# Altium PCB PCB1.PcbDoc
Units mm, origin at the board's own origin, x right, y up, seen from the top; angles counter-clockwise.
Board outline 50 x 30 mm, 2 copper layers (Top Layer, Bottom Layer), stack 1.581 mm thick; 38 components, 18 nets, 107 pads, 263 vias.
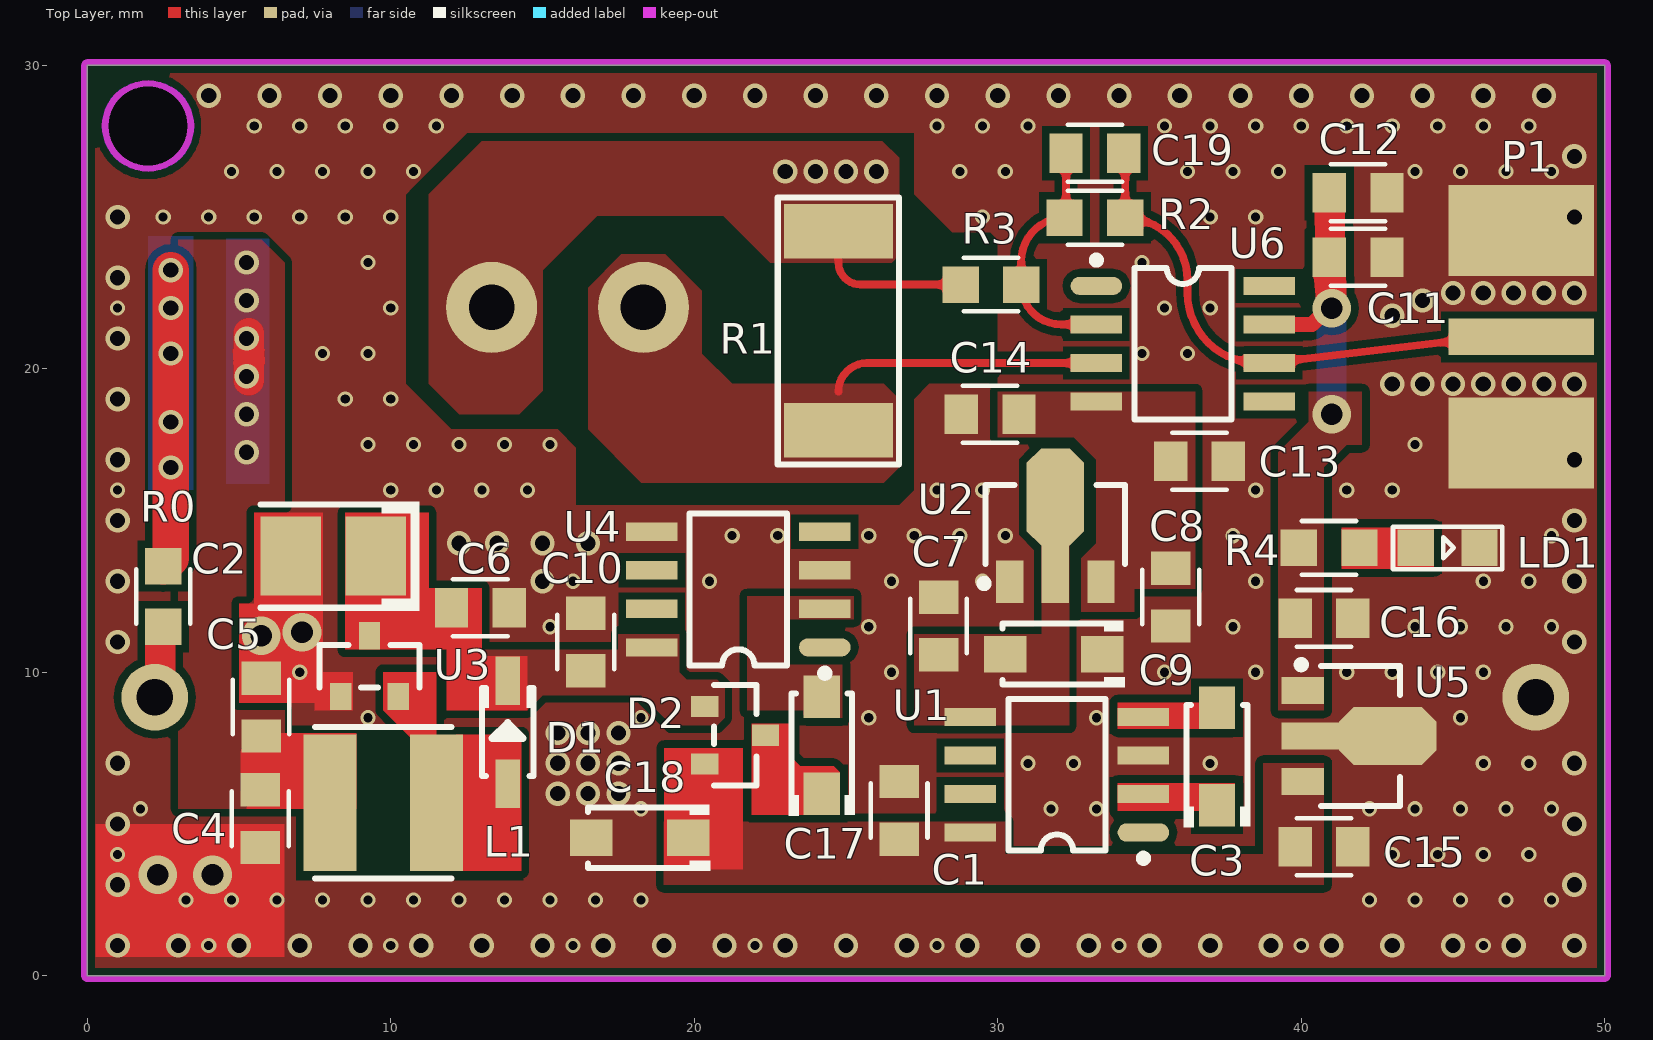
[diagram p0: Top Layer view]
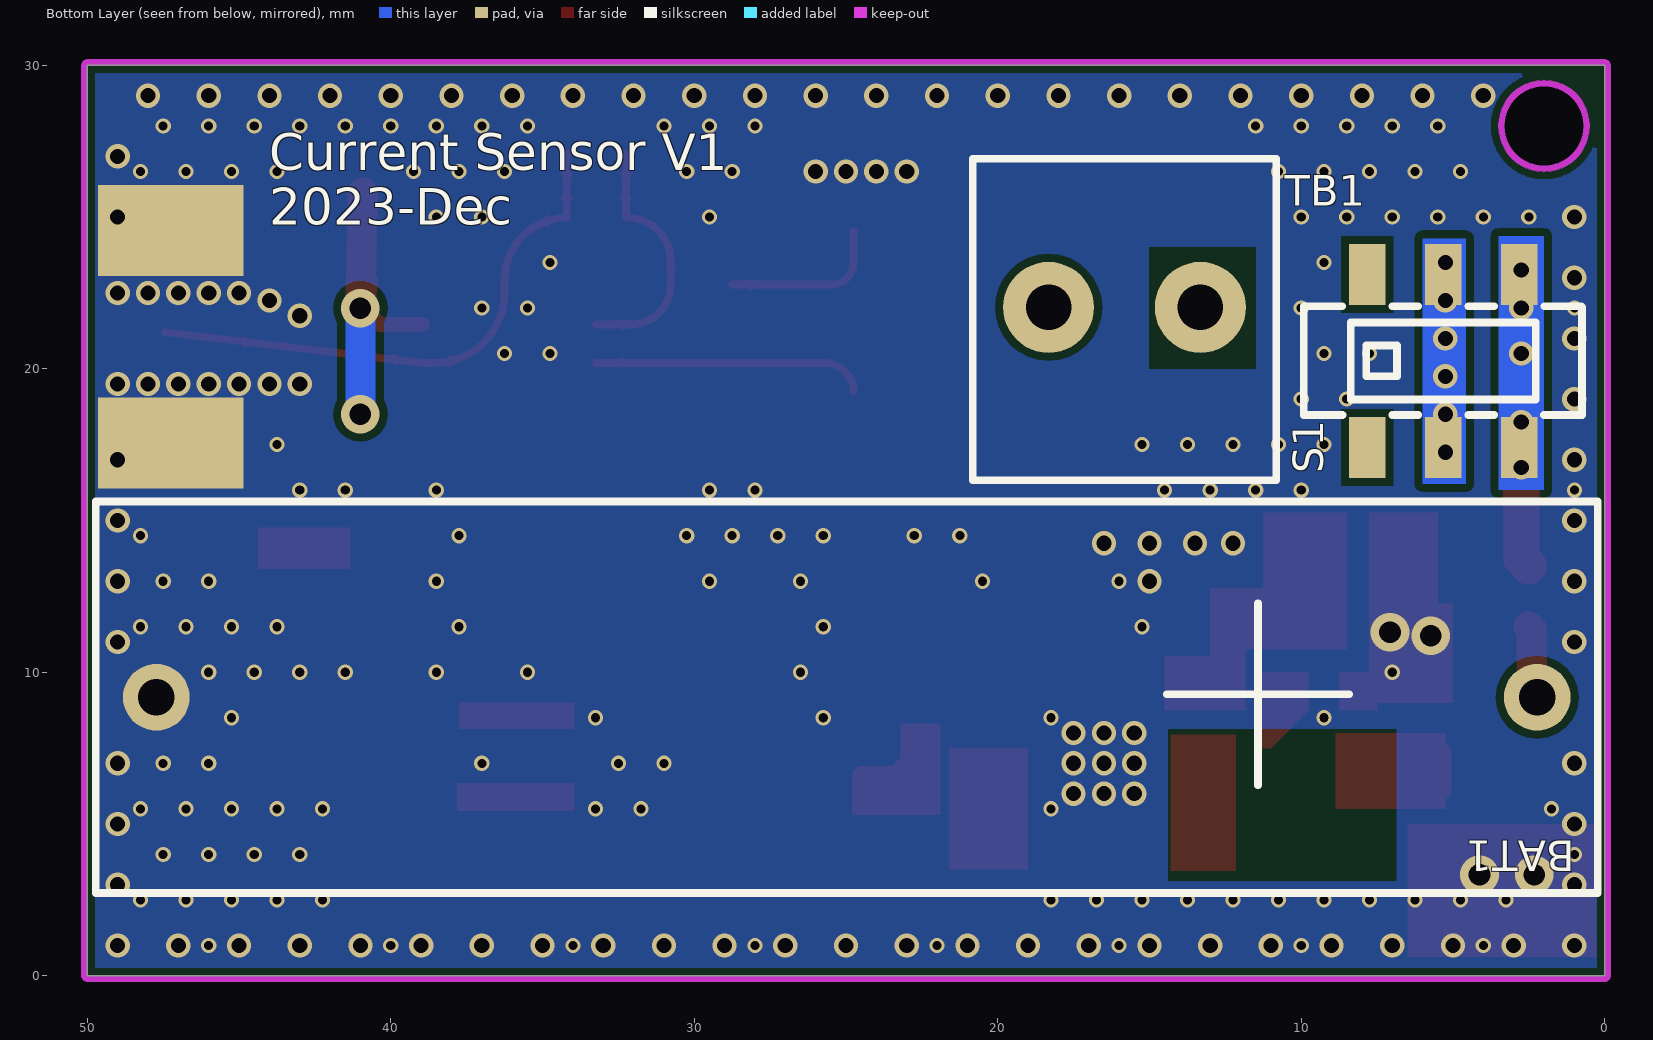
[diagram p1: Bottom Layer view, seen from below]
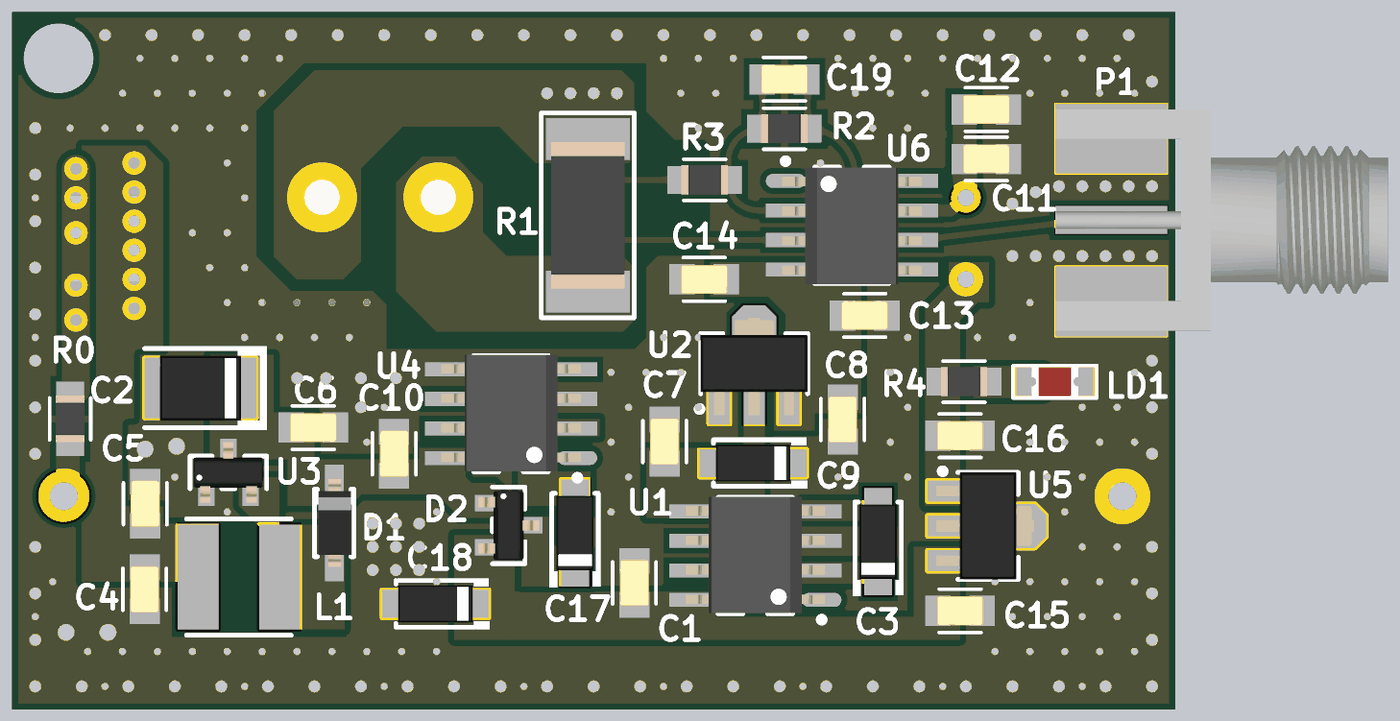
[diagram p2: 3D render of the assembled board from above, using the file's embedded part models]

## Layer stack, top to bottom
Top Solder: solder mask 0.0102, Solder Resist, Dk 3.5
Top Layer: signal copper 0.0356
Dielectric 1: dielectric 1.51, FR-4, Dk 4.8
Bottom Layer: signal copper 0.0356
Bottom Solder: solder mask 0.0102, Solder Resist, Dk 3.5

## Board outline
0,0 0,30 50,30 50,0
cut-out: 2,26.5 cw(c2,28) 0.5,28 cw(c2,28) 2,29.5 cw(c2,28) 3.5,28 cw(c2,28)

## Design rules (kind name [scope] priority, off if disabled: settings)
Clearance [All] p1: gap=0.254 ignorepadtopadclearanceinfootprint=FALSE except(0: Arc-Hole Track-Hole SMDPad-Hole THPad-Hole Via-Hole Fill-Hole Poly-Hole Region-Hole Text-Hole)
MinimumSolderMaskSliver [All] p1: minsoldermaskwidth=0
PlaneConnect [All] p1: planeconnectstyle=Direct reliefexpansion=0.508 reliefentries=4 reliefconductorwidth=0.254 reliefairgap=0.254
PolygonConnect [All] p1: connectstyle=Direct reliefconductorwidth=0.254 reliefentries=4 polygonreliefangle="90 Angle" airgapwidth=0.254
RoutingVias [All] p1: holewidth=0.5 width=0.8 viastyle="Through Hole" minholewidth=0.3 minwidth=0.5 maxholewidth=1 maxwidth=1.5
SilkToSilkClearance [All] p1: silktosilkclearance=0
SilkToSolderMaskClearance [IsPad] p1: minsilkscreentomaskgap=0 clearancetoexposedcopper=TRUE
SolderMaskExpansion [All] p1: expansion=0.102 istentingtop=FALSE
Width [All] p1: maxlimit=2 minlimit=0.254 preferedwidth=0.254 minimp=50.000000 maximp=50.000000 favimp=50.000000
26 further rules are at their usual default settings.

## Components (designator, comment, footprint, x,y, rotation, side; value= is the part's Value field where it differs from the comment)
BAT1 "AAA HOLDER" "AAA Battery Holder" 2.225,9.175 r0 bottom locked
C1 "10uF" 0805_CAP 26.75,5.45 r270 top
C2 "22uF/16V" CASEB_EIA3528-21 8.1,13.825 r180 top
C3 "10uF/16V" CASEA_EIA3216-18 37.225,7.225 r90 top
C4 "10uF" 0805_CAP 5.7,5.175 r90 top
C5 "10uF" 0805_CAP 5.725,8.85 r270 top
C6 "10uF" 0805_CAP 12.95,12.125 r180 top
C7 "1uF" 0805_CAP 28.05,11.525 r270 top
C8 "1uF" 0805_CAP 35.7,12.475 r90 top
C9 "10uF/16V" CASEA_EIA3216-18 31.85,10.6 r180 top
C10 "10uF" 0805_CAP 16.425,11 r270 top
C11 "1uF" 0805_CAP 41.875,23.675 r180 top
C12 "0.1uF" 0805_CAP 41.875,25.8 r180 top
C13 "1uF" 0805_CAP 36.65,16.95 r180 top
C14 "0.1uF" 0805_CAP 29.75,18.5 r0 top
C15 "1uF" 0805_CAP 40.75,4.25 r180 top
C16 "1uF" 0805_CAP 40.75,11.775 r180 top
C17 "10uF/16V" CASEA_EIA3216-18 24.2,7.6 r90 top
C18 "10uF/16V" CASEA_EIA3216-18 18.2,4.55 r180 top
C19 "100pF" 0805_CAP 33.2,27.1 r180 top
D1 "1N5817" SOD123 13.85,8.025 r90 top
D2 "BAT54S" SOT23 21.35,7.925 r270 top
L1 "?uH" IND_40x45x3.2 9.75,5.7 r0 top
LD1 "Red" LED0805_Red 44.825,14.1 r0 top
P1 "SMA_FEMALE_EDGE" SMA_EDGE_CONNECTOR 47.25,21.05 r0 top
R0 "0R" 0805_res 2.5,12.5 r270 top
R1 "100mR" 2512-1.8 24.75,21.25 r270 top
R2 "47K" 0805_res 33.2,24.975 r0 top
R3 "1K" 0805_res 29.775,22.775 r0 top
R4 "1K" 0805_res 40.92,14.098 r180 top
S1 "Slide DPDT" SW_DPDT_SMD 4.725,20.075 r180 bottom
TB1 "2pin Terminal" TB_SCW_5mm_2way_Horz_TE101 15.825,22.025 r0 bottom
U1 "TC7660M/TR" SO8 31.95,6.625 r90 top
U2 "79L05" SOT89 31.9,14.875 r90 top
U3 "QX2303L50T" SOT23 9.3,10.2 r0 top
U4 "TC7660M/TR" SO8 21.45,12.725 r90 top
U5 "78L05" SOT89 41.95,7.9 r0 top
U6 "OPA189" SO8 36.1,20.825 r270 top

## Footprints (in the part's own frame and the unit in brackets; to place one, negate y for a bottom-side part, rotate by r counter-clockwise, add the part's x,y. Pads: shape width x height; smd on the part's side, far side on the other; paste and mask are expansions set on the pad)
0805_CAP [mm] "Capacitor standard 2012"
  rect 1.1x1.3 smd mask+0: 1(-0.95,0) 2(0.95,0)
  silkscreen extent -0.9,-0.94 0.9,0.94, body extent -1,-0.62 1,0.63, height 1
0805_res [mm] "Resistor standard 2012"
  rect 1.2x1.2 smd mask+0: 1(-1,0) 2(1,0)
  silkscreen extent -0.9,-0.89 0.9,0.89, body extent -1,-0.62 1,0.63, height 0.45
2512-1.8 [mm] "2512 - 6.35 x 3.18 x 1mm, solder pad 1.8 x 3.18mm"
  rect 1.8x3.6 smd mask+0: 1(-3.28,0) 2(3.28,0)
  silkscreen extent -4.4,-2 4.4,2, body extent -3.15,-1.57 3.15,1.58, height 0.6
"AAA Battery Holder" [mm]
  round 2.2 hole 1.2: 1(0,0) 2(45.5,0)
  silkscreen extent -2,-6.45 47.5,6.45, body extent -1.9,-6.4 47.4,6.33, height 12
CASEA_EIA3216-18 [mm] "Tantalum Case A (1206), 3.2 x 1.6 x 1.8mm high"
  rect 1.4x1.2 smd: 1(-1.6,0) 2(1.6,0)
  silkscreen extent -2.34,-1.1 1.7,1.1, body extent -1.6,-0.8 1.6,0.8, height 1.61
CASEB_EIA3528-21 [mm] "Tantalum Case B, EIA 3528-21, 3.5 x 2.8 x 2.1mm high"
  rect 2x2.6 smd: 1(-1.4,0) 2(1.4,0)
  silkscreen extent -2.85,-1.8 2.4,1.8, body extent -1.75,-1.4 1.75,1.4, height 1.91
IND_40x45x3.2 [mm]
  rect 1.75x4.5 smd: 1(-1.75,0) 2(1.75,0)
  silkscreen extent -2.25,-2.5 2.25,2.5, body extent -2.25,-2 2.25,2, height 3.2
LED0805_Red [mm] "LED 0805, 2.0 x 1.2 x 0.4mm high"
  rect 1.2x1.2 smd: 1(-1.05,0) 2(1.05,0)
  silkscreen extent -1.8,-0.7 1.8,0.7, body extent -1,-0.62 1,0.63, height 1.08
SMA_EDGE_CONNECTOR [mm]
  rect 4.8x3 smd paste+0 mask+0.051: 1(0,-3.5) 2(0,3.5)
  rect 4.8x3 smd far side paste+0 mask+0.051: 3(0,3.5) 4(0,-3.5)
  rect 4.8x1.2 smd paste+0 mask+0.051: 5(0,0)
  body extent -2.38,-4.76 11.89,4.76, height 4.35
SO8 [mm] "SO (D-8) 8 pin, 6 x 5 x 1.7mm, 3.3mm wide body"
  oval 0.6x1.7 smd mask+0: 1(-1.905,-2.85)
  rect 0.6x1.7 smd mask+0: 2(-0.635,-2.85) 3(0.635,-2.85) 4(1.905,-2.85) 5(1.905,2.85) 6(0.635,2.85) 7(-0.635,2.85) 8(-1.905,2.85)
  silkscreen extent -2.88,-2.97 2.5,1.6, body extent -2.47,-3 2.53,3, height 1.7
SOD123 [mm] "SOD-123; 2 Leads; Body 1.6 x 2.7, overall 1.6 x 3.9 x 1.35"
  rect 1.6x0.8 smd mask+0: 1(-1.7,0) 2(1.7,0)
  silkscreen extent -1.45,-0.92 1.5,0.85, body extent -1.89,-0.73 1.89,0.67, height 1.61
SOT23 [mm] "SOT23- 3 pin foot print, 2.5 x 3 x 1.1 body, 1.5 x 3 x 1.1"
  rect 0.7x0.9 smd mask+0: 1(-0.95,-1) 2(0.95,-1) 3(0,1)
  silkscreen extent -1.65,-0.7 1.65,0.7, body extent -1.5,-1.3 1.5,1.3, height 1.1
SOT89 [mm] "SOT89, 3-Leads, Overall 4.5 x 4.2, Body 4.5x2.4mm (max), Pitch 1.50mm, Lead Span 4.1mm, IPC Medium Density"
  rect 1.4x0.9 smd: 1(-1.9,1.5) 3(-1.9,-1.5)
  rect 1.9x0.9 smd: 2(-1.65,0)
  oct 3.2x1.9 smd: 2(0.9,0)
  silkscreen extent -2.07,-2.3 1.3,2.47, body extent -2.22,-2.3 1.98,2.3, height 1.5
SW_DPDT_SMD [mm]
  rect 1.2x2 smd paste+0 mask+0.051: 1(-3.095,3.033) 2(-0.595,3.033) 3(1.905,3.033) 4(-3.095,-2.667) 5(-0.595,-2.667) 6(1.905,-2.667)
  silkscreen extent -5.19,-1.59 3.98,1.98, body extent -5.15,-1.55 3.95,1.95, height 5.5
TB_SCW_5mm_2way_Horz_TE101 [mm] "Terminal Block, Screw, 5mm pitch, 2 pin10 x 10 x 13.8h, Green, Wire horz to board"
  round 3 hole 1.5 mask+0: 1(-2.5,0) 2(2.5,0)
  silkscreen extent -5,-4.9 5,5.7, body extent -5,-5 5.6,5, height 13.8

## Part data
BAT1: library part BATT_HOLDER_AAA, "LCSC#: C5290189 / Mfr.#: BH-AAA-A1AJ001 / Mfr: MYOUNG / Battery case No 7 - Battery Connectors ROHS"
C1 C4 C5 C6 C7 C8 C10 C11 C12 C13 C14 C15 C16 C19: library part CC_?F_0805, "Capacitor, Ceramic,, ?F, ?V, 0805", Manufacturer=Murata, Category="Cap - Ceramic", Date Updated="1 July 2014", Engineer’s Name=WZ, Mfg_PN=GRM21BF51C225ZA01L, Notes="Capacitor, Ceramic, 2.2uF, 16V, Y5V, 0805", Supplier 2="RS Components", Supplier Part Number 2=312-3156, Verified="Correct desc from 50v to 16v"
C2: library part CT_22uF_16V_3528, "LCSC#: C122226 / Mfr.#: CA45-B016K226T / Mfr: Hunan Xiangyee in S&T / 22uF 16V 2.2Ω@100kHz ±10% CASE-B-3528 Tantalum Capacitors ROHS"
C3 C9 C17 C18: library part CT_10uF_16V_3216, "LCSC#: C119051 / Mfr.#: CA45-A016K106T / Mfr: Hunan Xiangyee in S&T / 10uF 16V 3Ω@100kHz ±10% CASE-A-3216 Tantalum Capacitors ROHS"
D1: library part DI_1N5817, "LCSC#: C5185908 / Mfr.#: 1N5817W / Mfr: Slkor(SLKORMICRO Elec.) / SOD-123 Schottky Barrier Diodes (SBD) ROHS"
D2: library part DI_BAT54S, "LCSC#: C2762214 / Mfr.#: BAT54S / Mfr: Shandong Jingdao Microelectronics / 30V Dual 1V@100mA 0.2A SOT-23 Schottky Barrier Diodes (SBD) ROHS"
L1: library part IND_?uH_4045, "LCSC#: C2929422 / Mfr.#: CY43-47UH / Mfr: SHOU HAN / 400mA 47uH ±10% 525mΩ SMD,4x4.5mm Inductors (SMD) ROHS"
LD1: library part LED_RED230mcd_2013, "LED, Red, 2.0V, Imax 30mA, 120deg. At 20mA => Wavelength = 630nm, 230mcd, 0805", Manufacturer=Kingbright, Category="Diode - LED", Mfg_PN=KPT-2012SURCK, Supplier 2=Farnell, Supplier Part Number 2=2099241, URL=http://www.farnell.com/datasheets/1753997.pdf, Used_for=Alarm
P1: library part CONN_SMA_RF_EDGE, "SMA FEMALE Edge Connector"
R0 R2 R3 R4: library part RS_?R_0805, "Resistor, ?ohm, 0805", Manufacturer=MULTICOMP, Category=Resistor, Mfg_PN=MC0.1W08051%10KFR, Notes="Resistor, 10k 100mW 1%, 0805", Supplier 2=Element14, Supplier 3=Digikey, Supplier Part Number 2=2129195, Supplier Part Number 3=311-10.0KCRCT-ND
R1: library part RS_?R_2512, "2512 Resistor"
S1: library part SW_Slide_DPDT, "LCSC#: C2906280 / Mfr.#: MST22D18G2 125 / Mfr: SHOU HAN / Brick nogging 0.1A DPDT 12V Black 10000次 SMD Slide Switches ROHS"
TB1: library part TE101_2W_5mm, "Screw Terminal Block 5mm Pitch 2 Position, Green", Manufacturer=Dinkle, Supplier Part Number 1=TE101, Category=Connector, Mfg_PN=EK500V-02P, Notes="Replacable with Altronics P2034A", Supplier 1=Brooks, Supplier 2="Element 14", Supplier 3=Digikey, Supplier 4=ALTRONICS, Supplier Part Number 2=2293859, Supplier Part Number 3=277-1258-ND, Supplier Part Number 4="P 2034A"
U1 U4: library part IC_TC7660M/TR, "LCSC#: C512761 / Mfr.#: TC7660M/TR / Mfr: HGSEMI / SOP-8 Charge Pump"
U2: library part LDO_79L05, "LCSC#: C7543011 / Mfr.#: 79L05 / Mfr: HXY MOSFET / 100mA null 5V Negative 35V SOT-89 Linear Voltage Regulators (LDO) ROHS"
U3: library part IC_PMIC_SW_QX2303L50T, "LCSC#: C219027 / Mfr.#: QX2303L50T / Mfr: QX Micro Devices / boost converterType 5V 0.7V~5V 800mA SOT-23 DC-DC Converters ROHS"
U5: library part LDO_78L05, "LCSC#: C2891830 / Mfr.#: 78L05 / Mfr: YONGYUTAI / 49dB@(120Hz) 0.1A Fixed 5V Positive 35V SOT-89-3 Linear Voltage Regulators (LDO) ROHS"
U6: library part IC_OP_OPA189IDR, "LCSC#: C781811 / Mfr.#: OPA189IDR / Mfr: Texas Instruments / 14MHz 0.4uV 70pA Single 轨到轨 SOP-8 Precision OpAmps ROHS"

## Via types
v1: diameter 0.5, hole 0.3, Top Layer to Bottom Layer, tented both sides, 146 vias
v2: diameter 0.8, hole 0.5, Top Layer to Bottom Layer, tented both sides, 100 vias
v3: diameter 0.8, hole 0.5, Top Layer to Bottom Layer, 11 vias
v4: diameter 1.27, hole 0.711, Top Layer to Bottom Layer, tented both sides, 4 vias
v5: diameter 1.27, hole 0.711, Top Layer to Bottom Layer, 2 vias

## Nets (pads, with @x,y where several pads share a name; then routed paths per layer and width w, separated by ;. In a path a pad name is that pad's centre, name@x,y a point inside that pad or via, vN(x,y) a via of type N, cw(c..) or ccw(c..) an arc to the next point about the centre after c; other vN are vias at no path point)
5V: C11.2 C12.2 C16.2 R4.2 U5.1 U6.7 | length 9.6
  Top Layer w0.5: U6.7 40.351,21.46 40.891,22 v5(41,22)
  Top Layer w1: C12.2 40.967,23.676 v5(41,22)
  Bottom Layer w1: v5(41,18.5) v5(41,22)
9V: C1.2 C15.2 C18.1 D2.2 U1.8 U5.3
-5V: C8.2 C13.2 C14.2 U2.3 U6.4
-9V: C7.2 C9.2 U1.5 U2.2
Boost_Out: C2.1 C6.2 C10.2 D1.2 D2.1 U3.3 U4.8
GND: BAT1.2 C1.1 C2.2 C4.1 C5.1 C6.1 C7.1 C8.1 C9.1 C10.1 C11.1 C12.1 C13.1 C14.1 C15.1 C16.1 C18.2 LD1.2 P1.1 P1.2 P1.3 P1.4 R1.1 R3.1 TB1.1 U1.3 U2.1 U3.1 U4.3 U4.5 U5.2 | length 8
  Top Layer w0.254: R1.1 24.75,23.5 ccw(c25.475,23.5) 25.475,22.775 R3.1
  Top Layer w1: v4(4.125,3.325) 4.125,4.237 5.687,4.237 C4.1
  other v1: 4,1 10,1 16,1 22,1 28,1 34,1 40,1 46,1 3.25,2.5 4.75,2.5 6.25,2.5 7.75,2.5 9.25,2.5 10.75,2.5 12.25,2.5 13.75,2.5 15.25,2.5 16.75,2.5 18.25,2.5 42.25,2.5 43.75,2.5 45.25,2.5 46.75,2.5 48.25,2.5 1,4 43,4 44.5,4 46,4 47.5,4 1.75,5.5 18.25,5.5 31.75,5.5 33.25,5.5 42.25,5.5 43.75,5.5 45.25,5.5 46.75,5.5 48.25,5.5 31,7 32.5,7 37,7 46,7 47.5,7 9.25,8.5 18.25,8.5 25.75,8.5 33.25,8.5 45.25,8.5 7,10 26.5,10 35.5,10 38.5,10 41.5,10 43,10 44.5,10 46,10 15.25,11.5 25.75,11.5 37.75,11.5 43.75,11.5 45.25,11.5 46.75,11.5 48.25,11.5 16,13 20.5,13 26.5,13 29.5,13 38.5,13 46,13 47.5,13 21.25,14.5 22.75,14.5 25.75,14.5 27.25,14.5 28.75,14.5 30.25,14.5 37.75,14.5 48.25,14.5 1,16 10,16 11.5,16 13,16 14.5,16 28,16 29.5,16 38.5,16 41.5,16 43,16 9.25,17.5 10.75,17.5 12.25,17.5 13.75,17.5 15.25,17.5 43.75,17.5 8.5,19 10,19 7.75,20.5 9.25,20.5 34.75,20.5 36.25,20.5 1,22 10,22 35.5,22 37,22 9.25,23.5 34.75,23.5 2.5,25 4,25 5.5,25 7,25 8.5,25 10,25 29.5,25 37,25 38.5,25 4.75,26.5 6.25,26.5 7.75,26.5 9.25,26.5 10.75,26.5 28.75,26.5 30.25,26.5 36.25,26.5 37.75,26.5 39.25,26.5 43.75,26.5 45.25,26.5 46.75,26.5 48.25,26.5 5.5,28 7,28 8.5,28 10,28 11.5,28 28,28 29.5,28 31,28 35.5,28 37,28 38.5,28 40,28 41.5,28 43,28 44.5,28 46,28 47.5,28
  other v2: 1,1 3,1 5,1 7,1 9,1 11,1 13,1 15,1 17,1 19,1 21,1 23,1 25,1 27,1 29,1 31,1 33,1 35,1 37,1 39,1 41,1 43,1 45,1 47,1 49,1 1,3 49,3 1,5 49,5 15.5,6 16.5,6 17.5,6 1,7 15.5,7 16.5,7 17.5,7 49,7 15.5,8 16.5,8 17.5,8 1,11 49,11 1,13 15,13 49,13 12.25,14.25 13.5,14.25 15,14.25 16.5,14.25 1,15 49,15 1,17 49,17 1,19 43,19.5 44,19.5 45,19.5 46,19.5 47,19.5 48,19.5 49,19.5 1,21 43,21.75 44,22.25 45,22.5 46,22.5 47,22.5 48,22.5 49,22.5 1,23 1,25 49,25 23,26.5 24,26.5 25,26.5 26,26.5 49,27 4,29 6,29 8,29 10,29 12,29 14,29 16,29 18,29 20,29 22,29 24,29 26,29 28,29 30,29 32,29 34,29 36,29 38,29 40,29 42,29 44,29 46,29 48,29
  other v4: 2.325,3.325 5.725,11.2 7.075,11.325
NetBAT1_1: BAT1.1 R0.2 | length 2.4
  Top Layer w1: BAT1.1 2.4,9.35 2.4,11.4 R0.2
NetC3_1: C3.1 U1.2
NetC3_2: C3.2 U1.4
NetC17_1: C17.1 D2.3
NetC17_2: C17.2 U4.2
NetC19_2: C19.2 R2.1 R3.2 U6.2 | length 8.4
  Top Layer w0.254: C19.2 32.25,25.025 cw(c32.2,25.025) R2.1 ccw(c32.2,23.55) 30.775,23.55 R3.2 ccw(c32.09,22.775) 32.09,21.46 U6.2
NetD1_1: D1.1 L1.2 U3.2
NetLD1_1: LD1.1 R4.1
NetR1_2: R1.2 TB1.2 U6.3 | length 9
  Top Layer w0.254: 24.75,19.25 cw(c25.69,19.25) 25.69,20.19 U6.3
Vbatt: R0.1 S1.3 S1.6 | length 9.9
  Top Layer w1.2: R0.1 2.75,13.75 v3(2.75,23.25)
  other v3: 2.75,16.75 2.75,18.25 2.75,20.5 2.75,22
Vin: C4.2 C5.2 L1.1 S1.2 S1.5 | length 2.9
  Top Layer w1: v3@5.325,19.613 v3@5.325,21.175 ; 5.552,7.298 5.552,6.175 5.602,6.125 C4.2
  other v3: 5.25,17.25 5.25,18.5 5.25,19.75 5.25,21 5.25,22.25 5.25,23.5
Vout: C19.1 P1.5 R2.2 U6.6 | length 18.4
  Top Layer w0.254: C19.1 cw(c34.15,27.05) 34.2,27.05 R2.2 cw(c34.2,22.925) 36.25,22.925 36.25,22.5 ccw(c38.56,22.5) 38.56,20.19 U6.6 P1.5@47.45,21.2
pads on no net: S1.1 S1.4 U1.1 U1.6 U1.7 U4.1 U4.4 U4.6 U4.7 U6.1 U6.5 U6.8

## Polygon pours and split planes (outlines as drawn)
9V on Top Layer "9V_L01_P004" (solid, pour order 4): 19,5.075 19,3 40.75,3 40.75,7 38.75,7 38.75,4 30.25,4 30.25,5.075 25.25,5.075
NetC17_2 on Top Layer "NETC17_2_L01_P006" (solid, pour order 6): 25.25,12.5 25.25,11.75 23,11.75 23,10.25 24.875,10.25 24.875,8.5 23.6,8.5 23.6,8.75 21.75,8.75 21.75,12.5
GND on Top Layer "TOP_GND" (solid, remove dead copper, pour order 15): 15.5,18 16.1,17.4 16.1,13 13.034,13 13,13.034 11.509,13.034 11.509,14.691 10.976,15.224 0,15.224 0,30 10.5,30 10.5,19.5 12,18
GND on Top Layer "GND_L01_P013" (solid, remove dead copper, pour order 13): 26.75,15.5 27.25,16 27.25,19 27.75,19.5 30,19.5 30,24.25 29.75,24.5 28.5,24.5 27.25,25.75 27.25,30.5 50,30.5 50,-0.625 -0.675,-0.625 -0.675,15.5
GND on Top Layer "TOP_GND2" (solid, pour order 17): 8.575,30 8.575,23.825 12.525,27.775 29.35,27.775 29.35,30
5V on Top Layer "5V_L01_P012" (solid, pour order 12): 39.25,8.75 40.75,8.75 40.75,16.75 41.5,17.5 42,17.5 42,19.25 40.25,19.25 40.25,18.25 39.25,17.25
-5V on Top Layer "-5V_L01_P011" (solid, pour order 11): 36.5,12.75 34.5,12.75 34.5,12 32.75,12 32.75,13.75 33.25,14.25 33.25,17 32.5,17.75 30,17.75 30,19.25 36.5,19.25
GND on Top Layer "GND_L01_P010" (solid, pour order 10): 11.25,19.5 12.25,18.5 14.225,18.5 15,19.275 15,23.25 16.8,25.05 20.95,25.05 22.5,23.5 26.5,23.5 26.75,23.75 26.75,26.95 26.2,27.5 13,27.5 11.25,25.75
NetR1_2 on Top Layer "NETR1_2_L01_P009" (solid, pour order 9): 17.6,23.775 19.05,23.775 20.25,22.575 20.25,20.5 21.25,19.5 26.25,19.5 26.75,19 26.75,16.75 26.25,16.25 18.25,16.25 16.5,18 16.5,22.675
-9V on Top Layer "-9V_L01_P005" (solid, pour order 5): 27.25,11.25 31.45,11.25 31.45,14.75 32.35,14.75 32.35,8.25 27.25,8.25
GND on Top Layer "GND_L01_P003" (solid, pour order 3): 14.25,9.25 14.25,3.5 19,3.5 19,9.25
GND on Top Layer "GND_L01_P002" (solid, pour order 2): 19.5,14.25 17.5,14.25 17.5,10.75 13,10.75 13,12.775 11.25,12.775 11.25,15.5 19.5,15.5
Boost_Out on Top Layer "BOOST_OUT_L01_P001" (solid, pour order 1): 12.75,10.75 17.5,10.75 17.5,11.25 19.5,11.25 19.5,10 19.75,9.75 20.75,9.75 21,9.5 21,8.5 20.75,8.25 19.25,8.25 18.25,9.25 15,9.25 14.5,8.75 12.75,8.75
Vin on Top Layer "VIN_L01_P000" (solid, pour order 0): 5.75,24.25 6.5,23.5 6.5,5.5 3,5.5 3,24.25
GND on Bottom Layer "GND_L02_P014" (solid, remove dead copper, pour order 14): 0,30 50,30 50,0 0,0

## Keep-outs
Keep-Out Layer:
  lines w0.2: -0.1,0 ccw(c0,0) 0,-0.1 ; -0.1,0 ccw(c0,0) 0,-0.1 ; -0.1,0 -0.1,30 ; -0.1,30 cw(c0,30) 0,30.1 ; -0.1,30 cw(c0,30) 0,30.1 ; 0,-0.1 50,-0.1 ; 0,30.1 50,30.1 ; 50,-0.1 ccw(c50,0) 50.1,0 ; 50,-0.1 ccw(c50,0) 50.1,0 ; 50,30.1 cw(c50,30) 50.1,30 ; 50,30.1 cw(c50,30) 50.1,30 ; 50.1,0 50.1,30 ; 0.6,28 cw(c2,28) 2,29.4 cw(c2,28) 3.4,28 cw(c2,28) 2,26.6 cw(c2,28) 0.6,28

## Other copper
Top Layer:
  rectangle net 9V: 19,3.5 21.6,7.5
  rectangle net GND: 0.275,0.625 6.5,5
  rectangle net NetLD1_1: 41.325,13.4 44.375,14.775
  rectangle net NetC3_2: 33.95,8.125 37.75,9
  rectangle net NetC3_1: 33.95,5.425 37.825,6.35
  rectangle net NetD1_1: 12.15,3.45 14.3,7.95
  rectangle net Vin: 5.25,5.5 8.875,8
  region net NetC17_1: 21.9,8.3 21.9,5.3 24.8,5.3 24.8,6.7 24.6,6.9 23.5,6.9 23.2,7.2 23.2,8.3
  region: 21.9,8.3
  pour cut-out: 6.875,8.125 6.875,3.125 14.375,3.125 14.375,8.125
  region net NetD1_1: 9.75,10 9.75,8.75 11,7.5 11.5,7.5 11.5,10
  region net GND: 5.5,15.25 5.5,12.25 5,12.25 5,9 7.5,9 7.5,8.75 8.75,8.75 8.75,10 7.75,10 7.75,15.25
  region net Boost_Out: 8.5,15.25 8.5,10.75 11.85,10.75 11.85,8.75 14.5,8.75 14.5,10.525 13,10.525 13,12.775 11.25,12.775 11.25,15.25
Bottom Layer:
  rectangle net Vbatt: 2,16 3.5,24.375
  rectangle net Vin: 4.575,16.2 6,24.3
  pour cut-out: 6.875,8.125 6.875,3.125 14.375,3.125 14.375,8.125
  pour cut-out: 11.5,24 11.5,20 15,20 15,24

## Silkscreen, mask and mechanical layers (free items; w line width, h text height)
Bottom Overlay:
  text "Current Sensor V1 / 2023-Dec" at 44,24.75 h1.2

## Text inside footprints (layer, text, board x,y; h text height)
R1: Mechanical 7 "0.8mm" at 25.35,22.35 h0.5 r270